# EAGLE board ZENER DIODE TESTER (EAGLE 6.5.0)
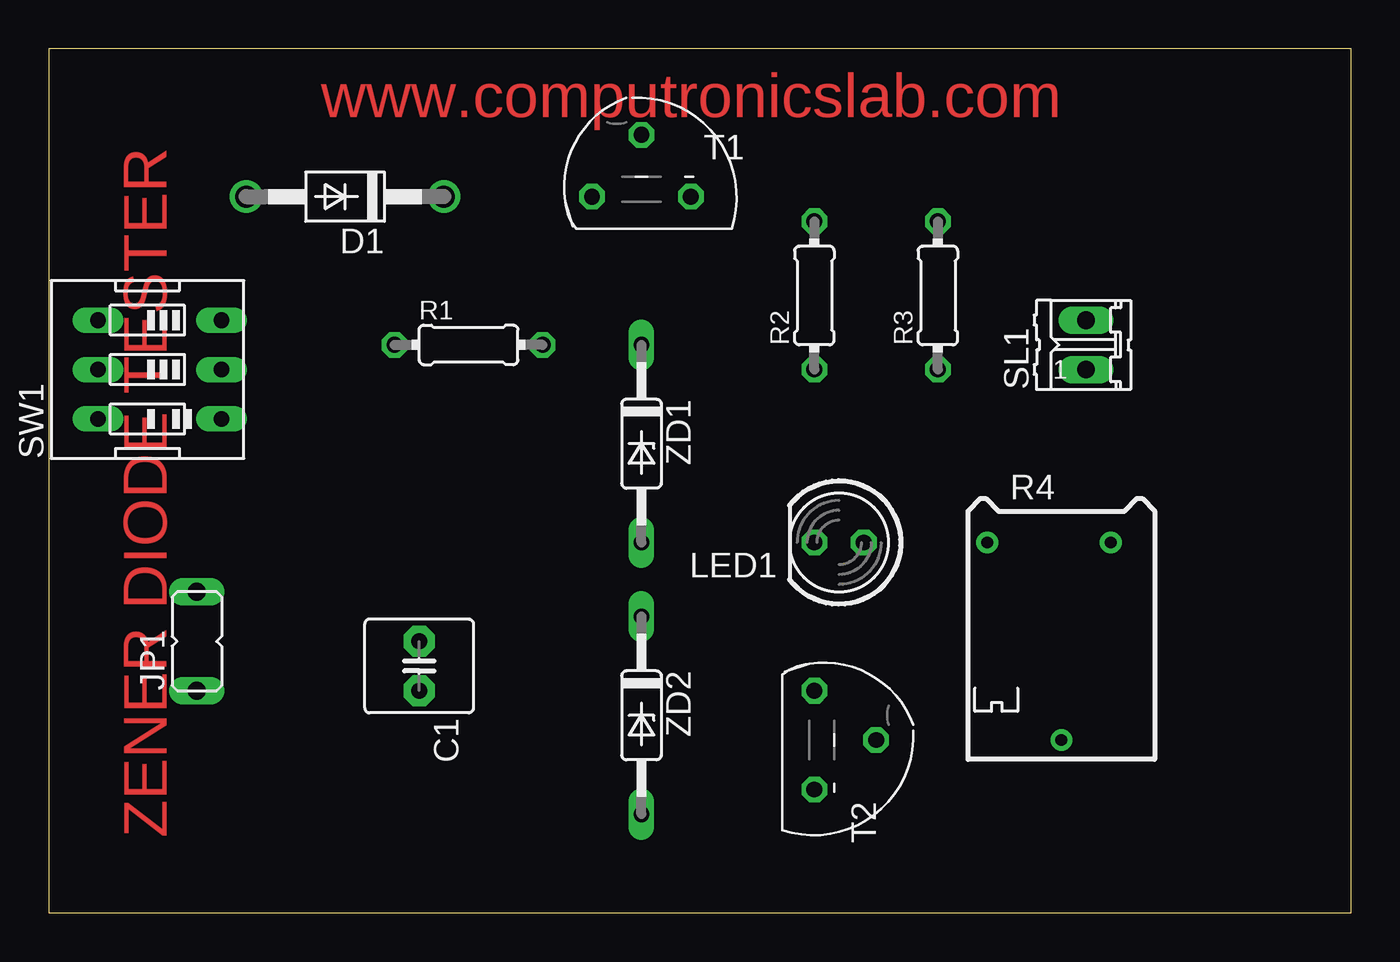
[diagram p0: board, top side]
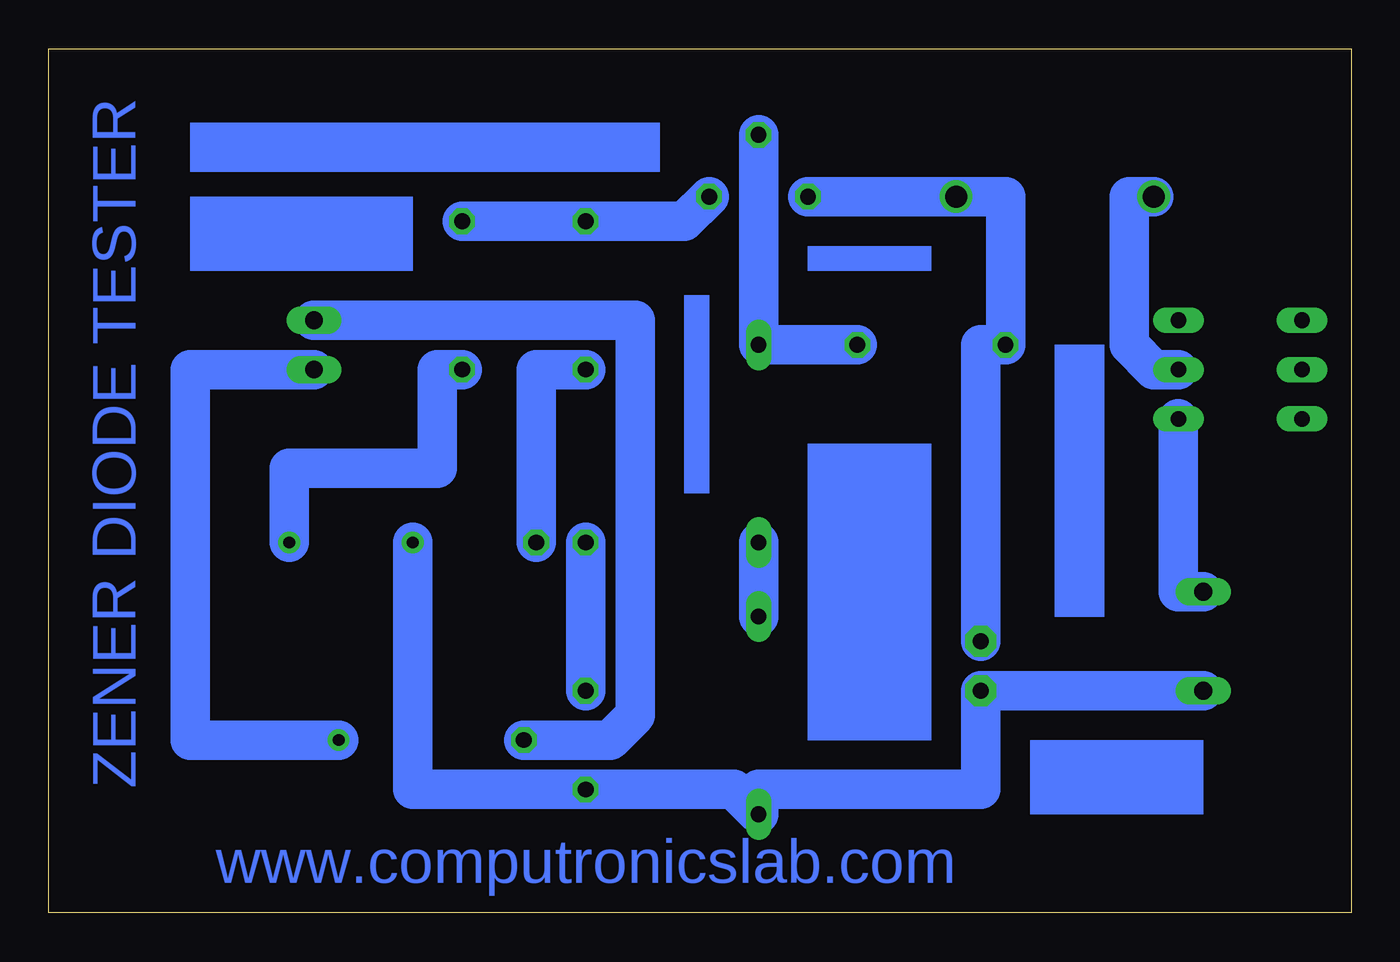
[diagram p1: board, bottom side, seen from below]

Size 66.98 x 44.44 mm. Coordinates in mm from the lower left corner, seen from the top.
Outline: 0,0 66.98,0 66.98,44.44 0,44.44 0,0
Copper layers (1*16): Top 0.035mm / dielectric 1.5mm / Bottom 0.035mm
Design rules "default *": minimum track width 80mil, minimum drill 24mil, track to track 8mil, track to pad 8mil, pad to pad 8mil, via to via 8mil, smd to smd 8mil, copper to edge 40mil, drill to drill 8mil, minimum pad ring 10mil, minimum via ring 8mil, stop-mask expansion 4mil, vias tented up to drill 0mil, thermal gap 10mil

## Footprints (pad centres in the part's own frame; a part is rotated, then mirrored left to right if it is on the bottom)
C2.5-6 = drill 0.813 pad 1.6 octagon: 1 -1.27,0; 2 1.27,0
DO41-10 = drill 1.118: A 5.08,0; C -5.08,0
JP1 = drill 0.914 long: 1 0,-2.54; 2 0,2.54
LED5MM = drill 0.813 octagon: A -1.27,0; K 1.27,0
0204/7 = drill 0.813 octagon: 1 -3.81,0; 2 3.81,0
RTRIM64P = drill 0.61: 1 -2.54,-3.81; 2 7.62,0; 3 -2.54,2.54
02P = drill 0.914 long: 1 -1.27,0; 2 1.27,0
EDG-03 = drill 0.813 long: 1 -2.54,-3.81; 2 0,-3.81; 3 2.54,-3.81; 4 2.54,2.54; 5 0,2.54; 6 -2.54,2.54
TO92 = drill 0.813 octagon: 1 2.54,-1.27; 2 0,1.905; 3 -2.54,-1.27
DO35Z10 = drill 0.813 long: A 5.08,0; C -5.08,0

## Placement (x,y rotation side)
C1  220uf  [C2.5-6]  19.05,12.7 270 top
D1  1N4007  [DO41-10]  15.24,36.83 180 top
JP1  transformer  [JP1]  7.62,13.97 0 top
LED1  5mm  [LED5MM]  40.64,19.05 180 top
R1  1K  [0204/7]  21.59,29.21 0 top
R2  1.5K  [0204/7]  39.37,31.75 90 top
R3  2.2K  [0204/7]  45.72,31.75 90 top
R4  47K  [RTRIM64P]  52.07,16.51 270 top
SL1  zener diode  [02P]  53.34,29.21 90 top
SW1  on/off switch  [EDG-03]  5.08,27.94 90 top
T1  BC547  [TO92]  30.48,38.1 0 top
T2  BC547  [TO92]  40.64,8.89 270 top
ZD1  10V  [DO35Z10]  30.48,24.13 270 top
ZD2  10V  [DO35Z10]  30.48,10.16 270 top

## Library data of the parts
C1 = capacitor-wima
D1 ZD1 ZD2 = diode
JP1 = jumper
LED1 = led
R1-R3 = rcl
R4 = resistor
SL1 = con-amp-quick; OC_FARNELL: unknown; OC_NEWARK: unknown
SW1 = special
T1 T2 = transistor

## Nets
N$1: LED1.A R2.1
N$2: LED1.K T2.3
N$3: JP1.2 SW1.1
N$4: D1.A SW1.2
N$5: C1.1 D1.C R1.1 T1.3
N$6: C1.2 JP1.1 R4.1 T2.1 ZD2.A
N$7: R1.2 T1.2 ZD1.C
N$8: ZD1.A ZD2.C
N$10: R2.2 R3.2 T1.1
N$11: R3.1 R4.3
N$12: SL1.2 T2.2
N$13: R4.2 SL1.1

## Tracks (layer width: path | path; a pad name or v marks a point on that pad's centre or on a via)
N$1
  Bottom 2.032: LED1.A 41.91,27.94 R2.1
N$2
  Bottom 2.032: LED1.K T2.3
N$3
  Bottom 2.032: SW1.1 8.89,16.51 JP1.2
N$4
  Bottom 2.032: SW1.2 10.16,27.94 11.43,29.21 11.43,36.83 D1.A
N$5
  Bottom 2.032: T1.3 D1.C 17.78,36.83 R1.1 19.05,29.21 C1.1
N$6
  Bottom 2.032: JP1.1 C1.2 19.05,6.35 30.48,6.35 ZD2.A 31.75,6.35 T2.1 48.26,6.35 R4.1
N$7
  Bottom 2.032: R1.2 ZD1.C T1.2
N$8
  Bottom 2.032: ZD1.A ZD2.C
N$10
  Bottom 2.032: R3.2 R2.2 34.29,35.56 T1.1
N$11
  Bottom 2.032: R3.1 46.99,27.94 46.99,22.86 54.61,22.86 R4.3
N$12
  Bottom 2.032: T2.2 38.1,8.89 36.83,10.16 36.83,30.48 SL1.2
N$13
  Bottom 2.032: R4.2 59.69,8.89 59.69,16.51 59.69,27.94 SL1.1
(copper drawn outside any net)
  shapes: Bottom area x7

## Text on the board
Top: www.computronicslab.com | ZENER DIODE TESTER
Bottom: ZENER DIODE TESTER | www.computronicslab.com